# Altium PCB PCBFINAL.PcbDoc
Units mm, origin at the board's own origin, x right, y up, seen from the top; angles counter-clockwise.
Board outline 189.99 x 133.6 mm, 4 copper layers (POWER, PGND, LOW POWER, SIGNAL/SGND); 85 components, 39 nets, 251 pads, 4 vias.
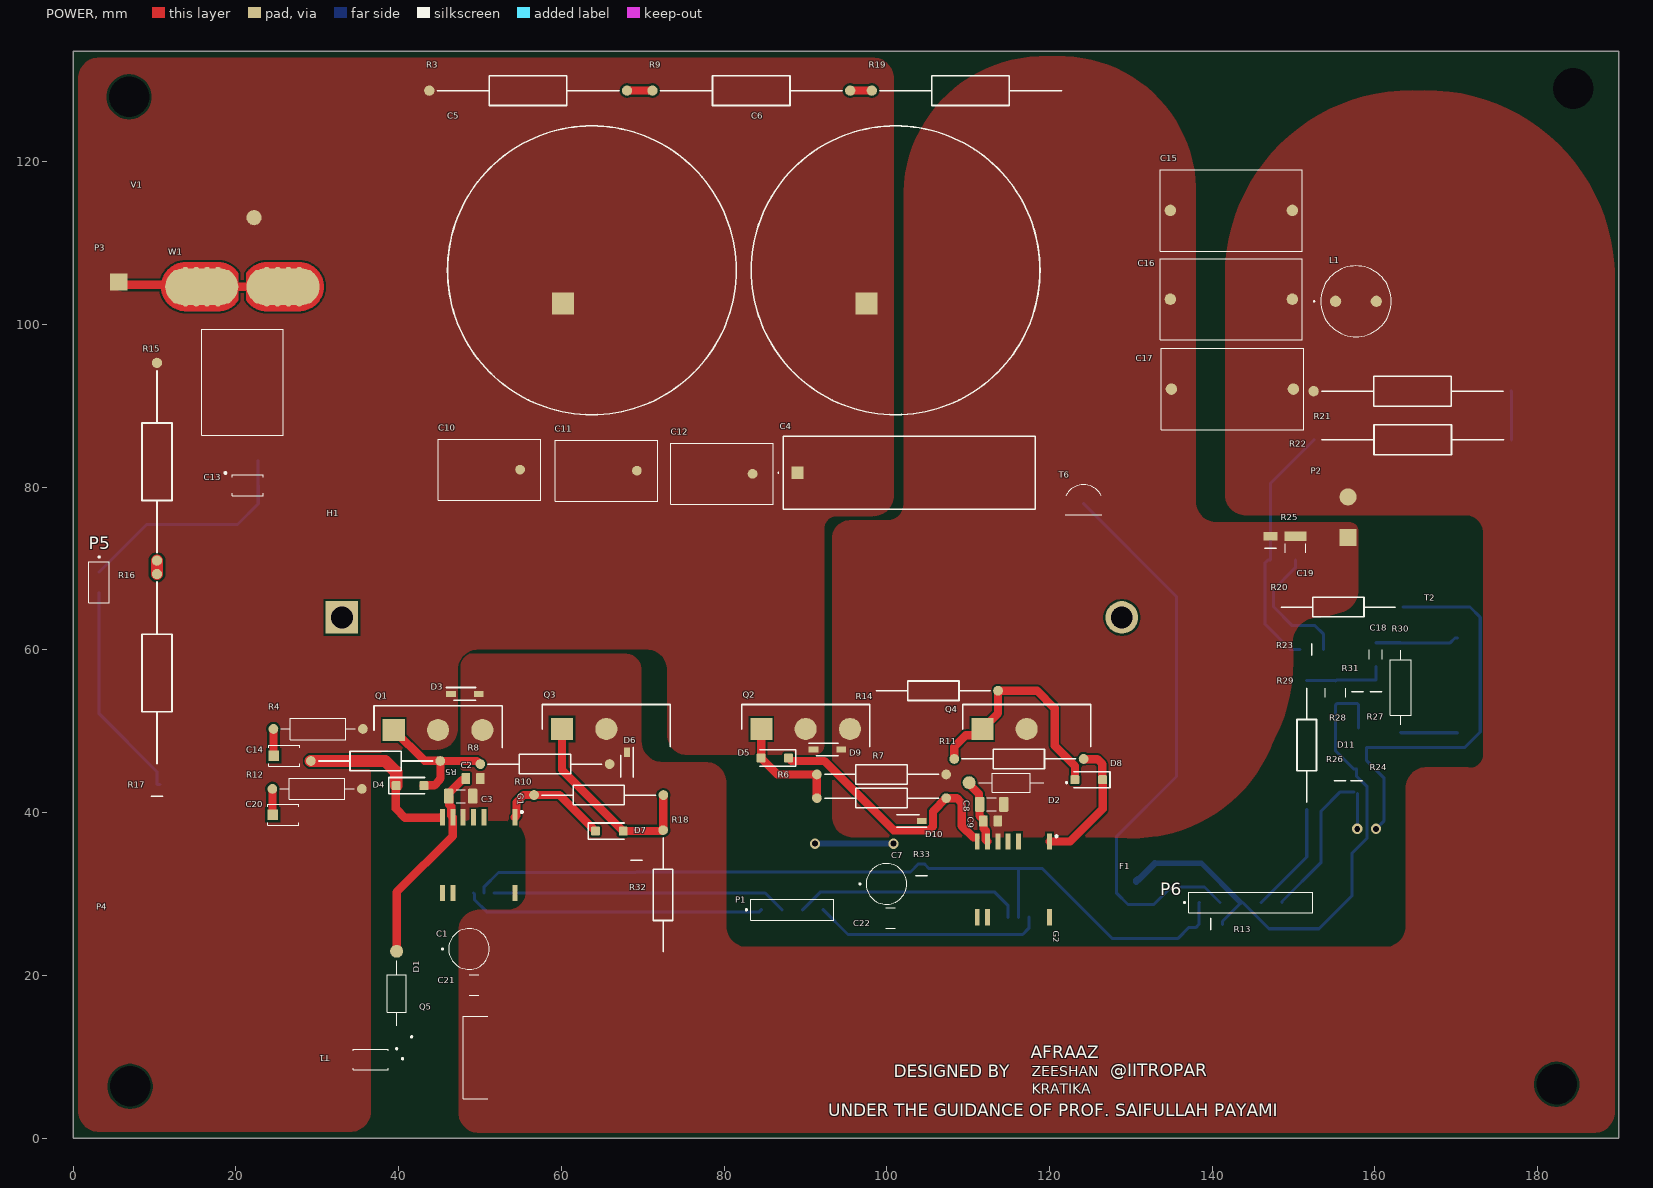
[diagram p0: POWER view]
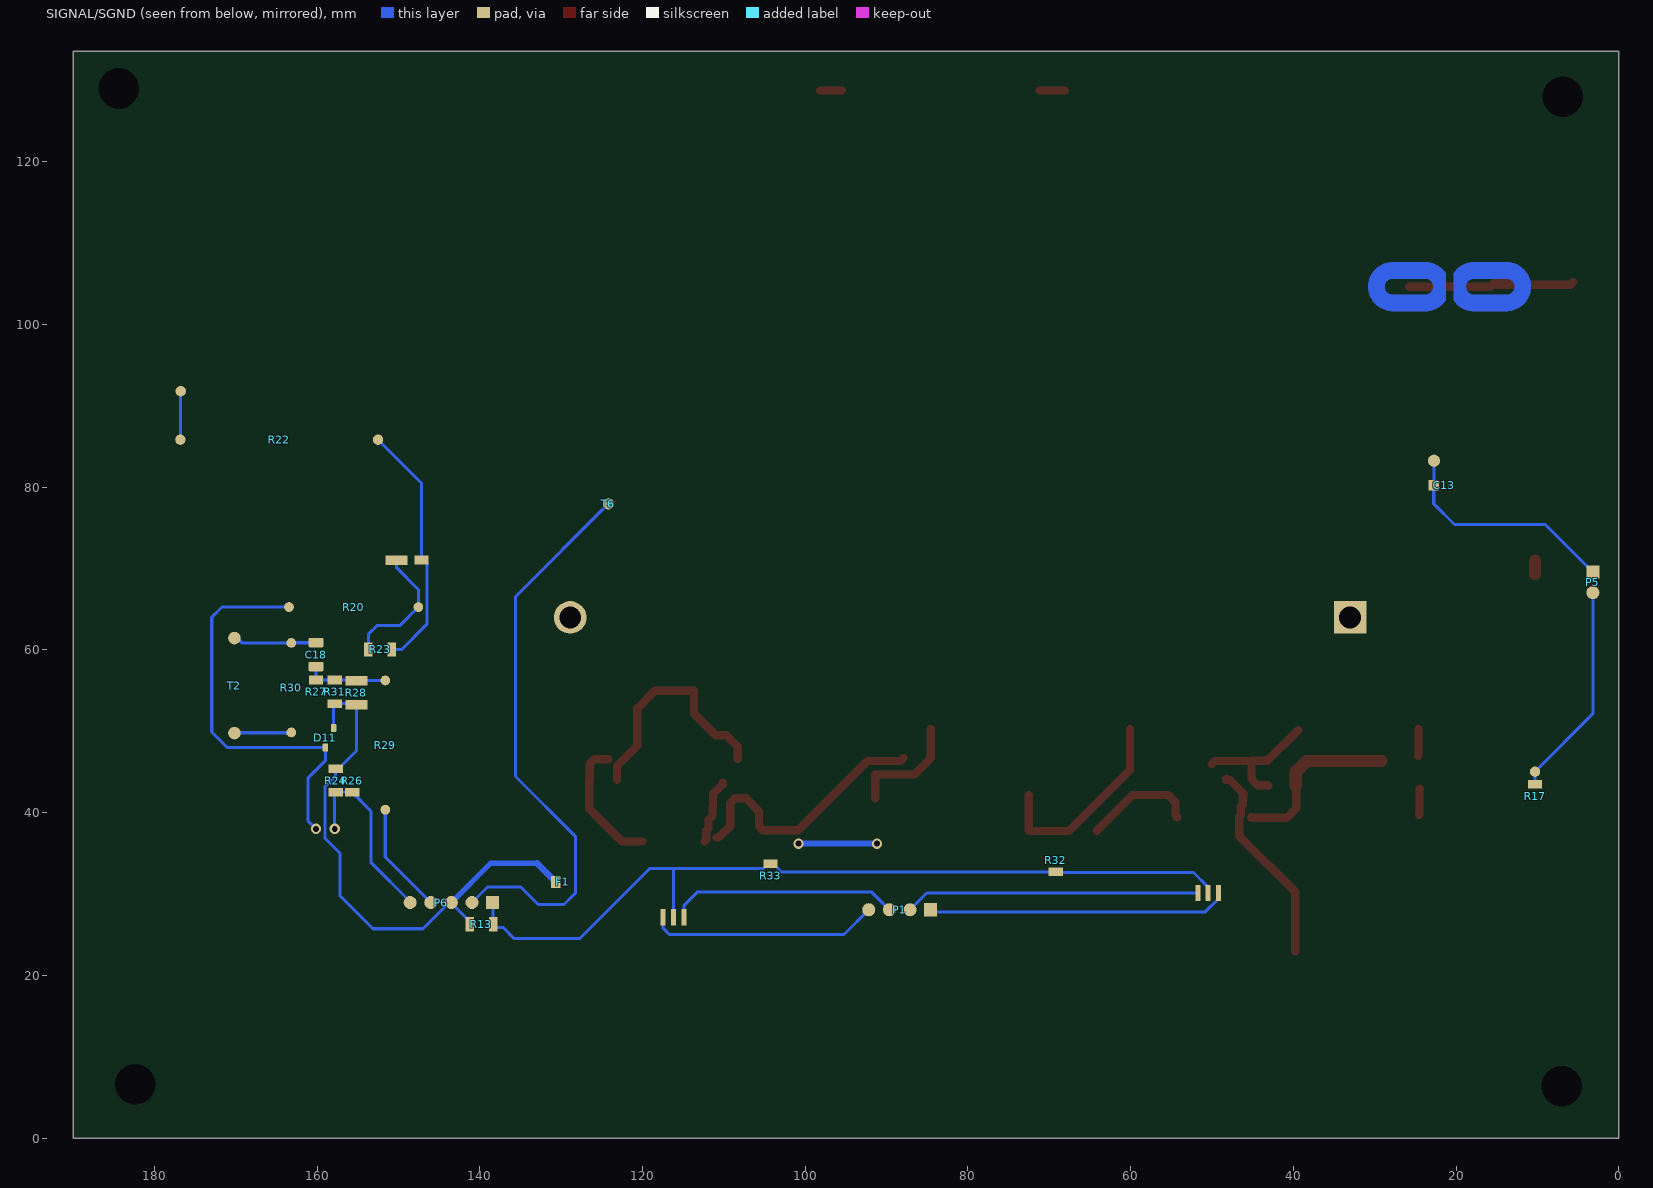
[diagram p1: SIGNAL/SGND view, seen from below]
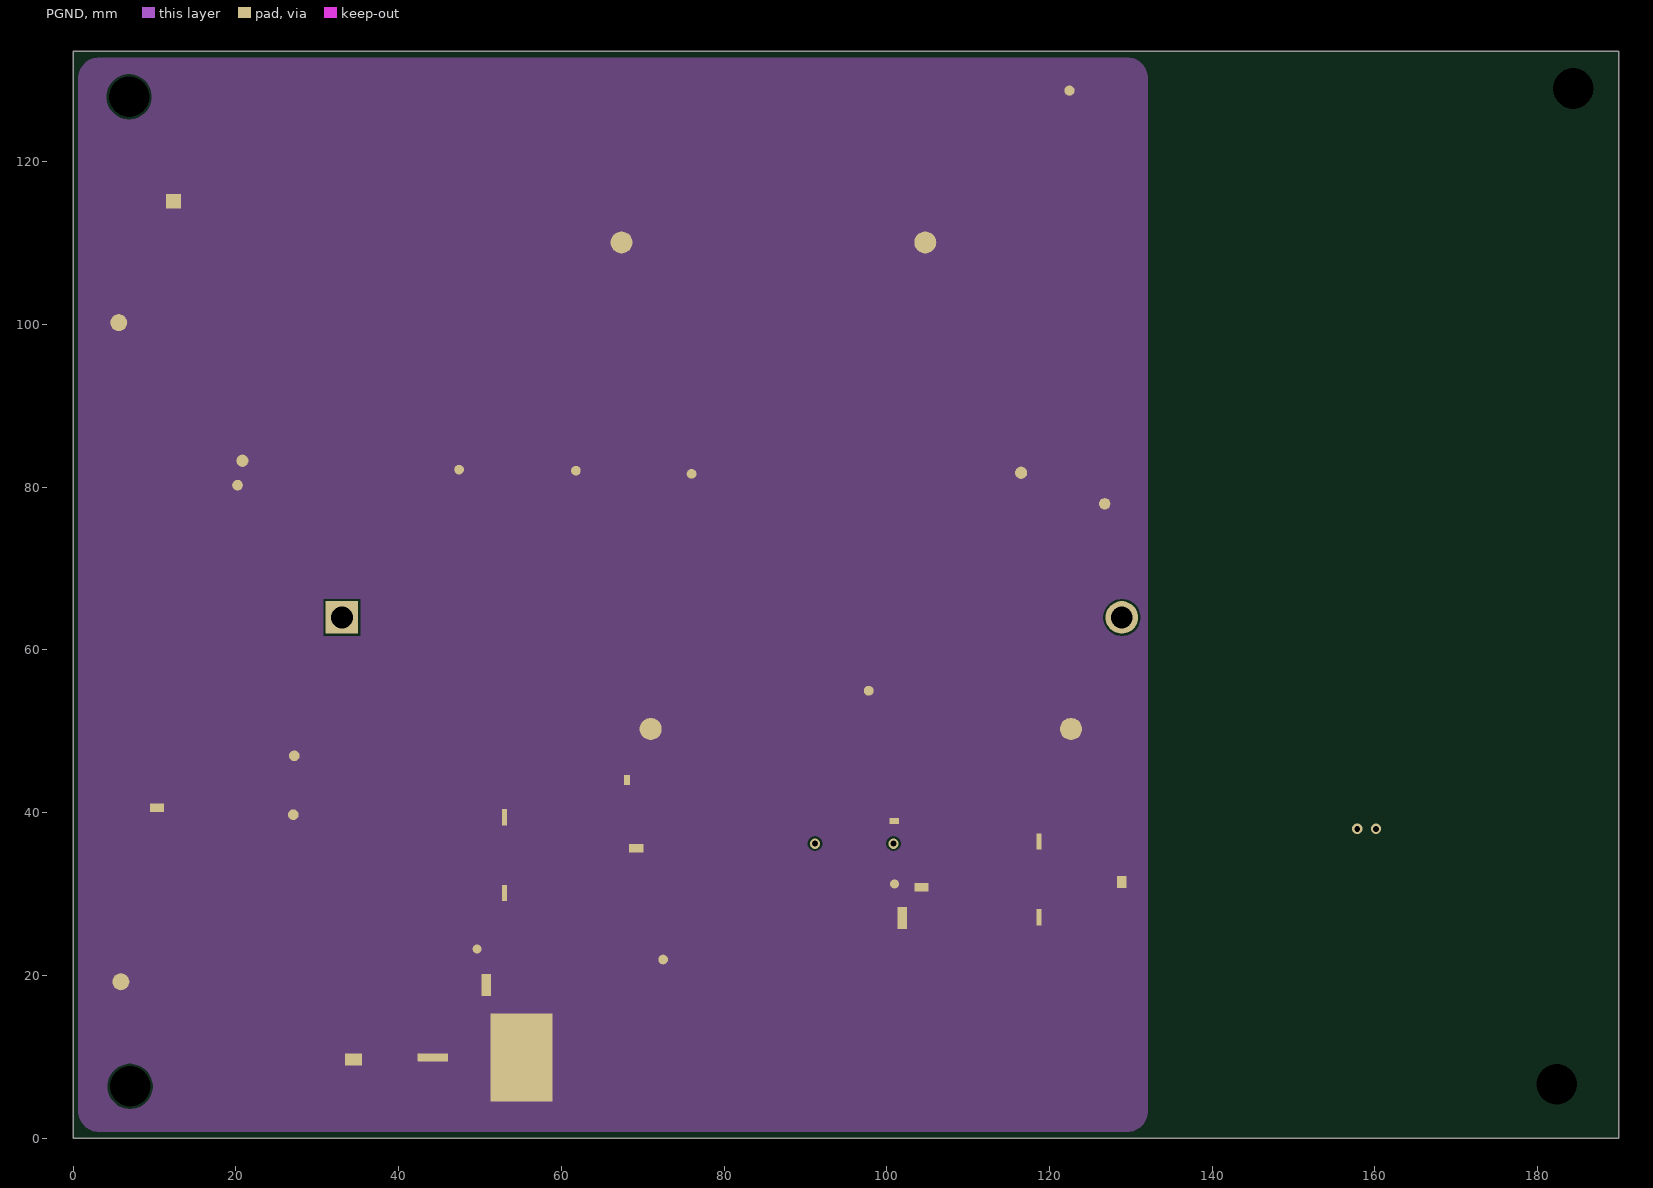
[diagram p2: PGND]
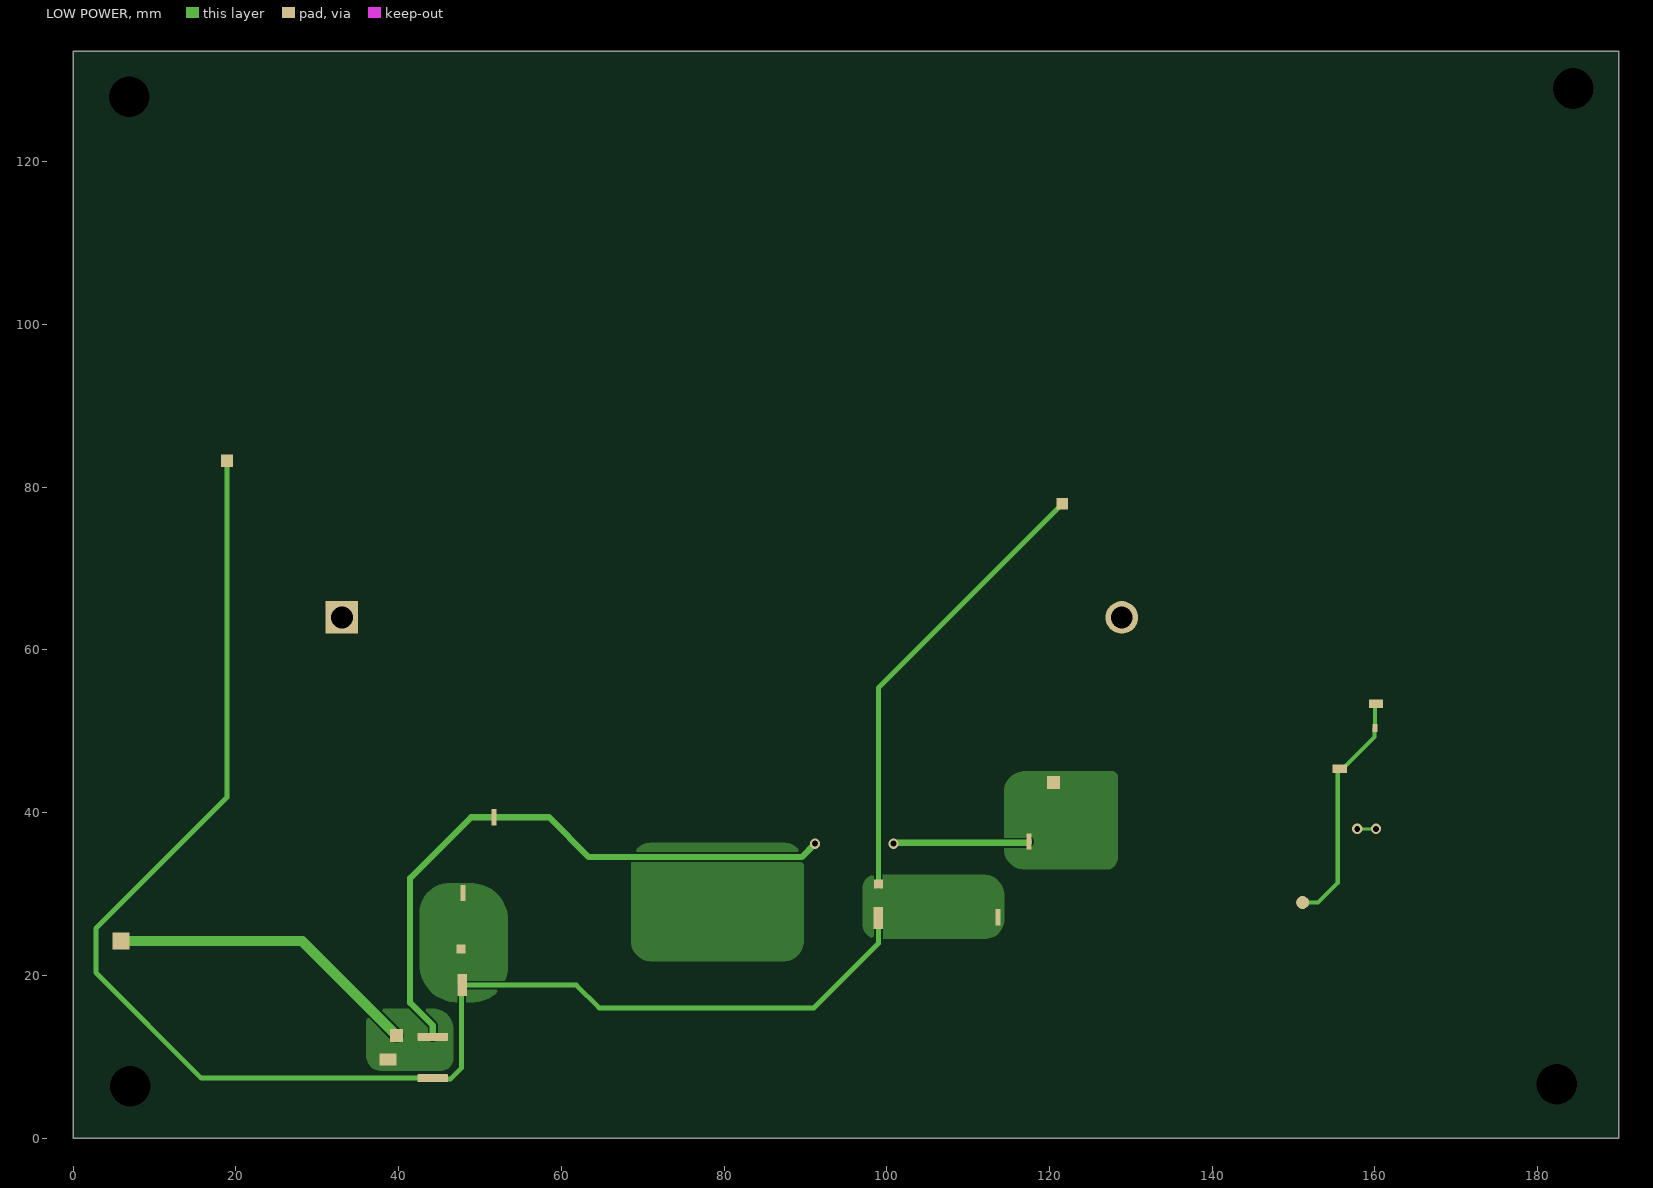
[diagram p3: LOW POWER]
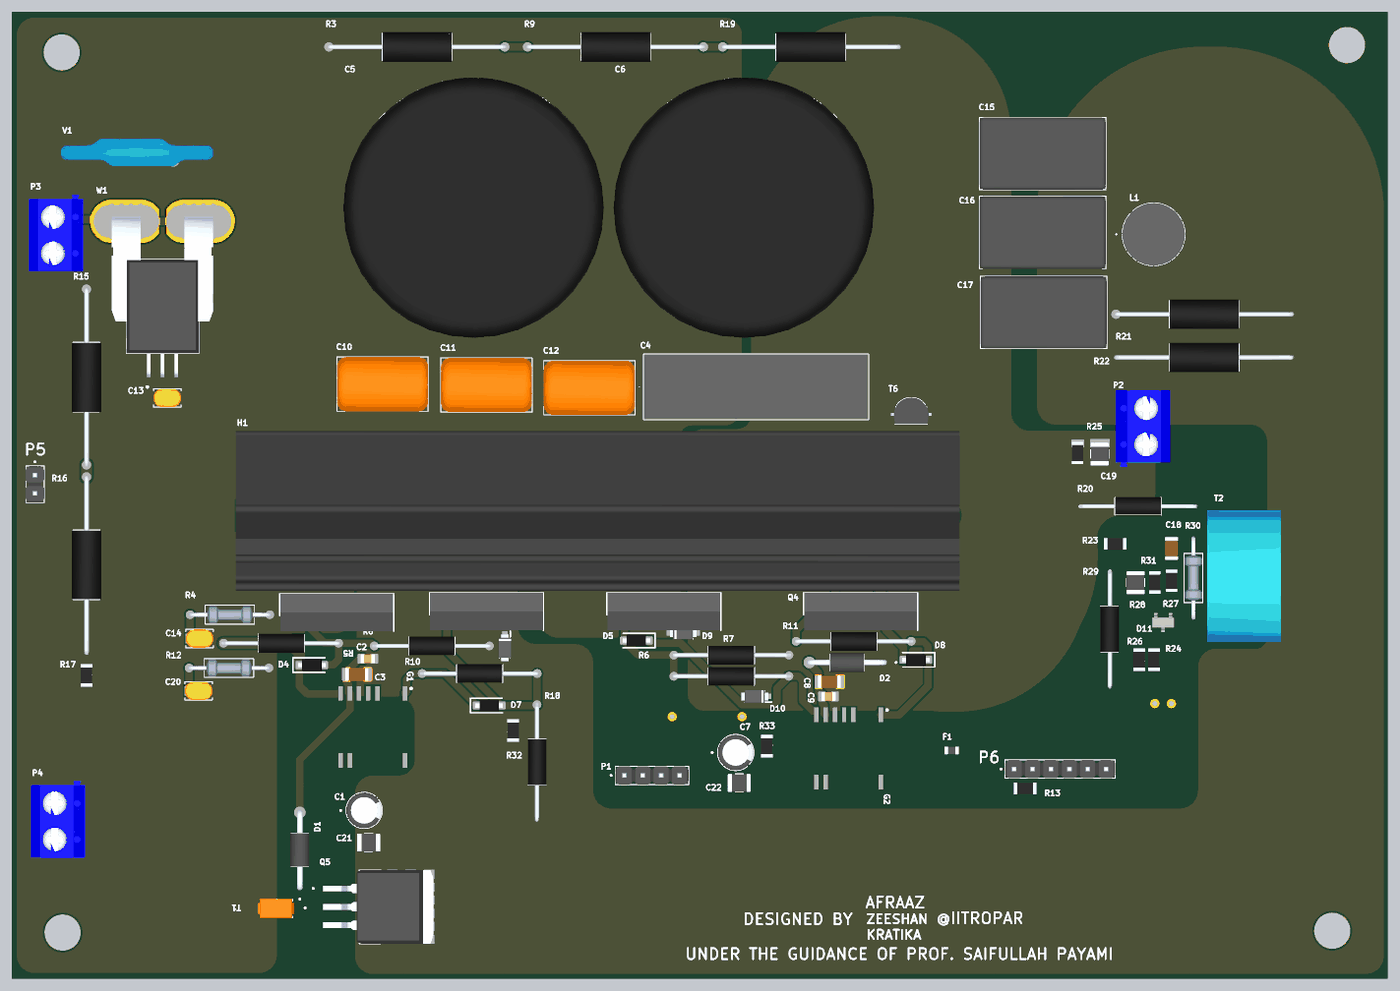
[diagram p4: 3D render of the assembled board from above, using the file's embedded part models]

## Layer stack, top to bottom
Top Solder: solder mask 0.0102, Solder Resist, Dk 3.5
POWER: signal copper 0.0356
Dielectric 1: dielectric 0.32, FR-4, Dk 4.8
PGND: signal copper 0.0356
Dielectric3: dielectric 0.32, FR-4, Dk 4.8
LOW POWER: signal copper 0.0356
Dielectric2: dielectric 0.32, FR-4, Dk 4.8
SIGNAL/SGND: signal copper 0.0356
Bottom Solder: solder mask 0.0102, Solder Resist, Dk 3.5

## Board outline
0,0 189.992,0 189.992,133.604 0,133.604

## Design rules (kind name [scope] priority, off if disabled: settings)
Clearance [All] p1: gap=0.254 ignorepadtopadclearanceinfootprint=FALSE
Height [All] p1: minheight=0 maxheight=53.34 prefheight=12.7
HoleSize [All] p1: absolutevalues=TRUE maxlimit=5.08 minlimit=0.025 maxpercent=80.000 minpercent=20.000
PolygonConnect [All] p1: connectstyle=Direct reliefconductorwidth=0.254 reliefentries=4 polygonreliefangle="90 Angle" airgapwidth=0.254
RoutingVias [All] p1: holewidth=0.711 width=1.27 viastyle="Through Hole" minholewidth=0.711 minwidth=1.27 maxholewidth=0.711 maxwidth=1.27
SilkToSolderMaskClearance [IsPad] p1: minsilkscreentomaskgap=0.203 clearancetoexposedcopper=TRUE
SolderMaskExpansion [All] p1: expansion=0 istentingtop=FALSE
SupplyNets "Schematic Supply Nets_4" [InNet('+12')] p1: voltage=0.000
SupplyNets "Schematic Supply Nets_3" [InNet('+380V')] p2: voltage=0.000
SupplyNets "Schematic Supply Nets_2" [InNet('SGND')] p3: voltage=0.000
SupplyNets "Schematic Supply Nets_1" [InNet('+5')] p4: voltage=0.000
SupplyNets "Schematic Supply Nets" [InNet('PGND')] p5: voltage=0.000
Width [All] p1: maxlimit=2.032 minlimit=0.254 preferedwidth=0.813 toplayer_prefwidth=1.524 midlayer1_maxwidth=0.254 midlayer1_prefwidth=0.254 midlayer2_maxwidth=1.27 bottomlayer_maxwidth=0.813 bottomlayer_prefwidth=0.381 minimp=50.000000 maximp=50.000000 favimp=50.000000
27 further rules are at their usual default settings.

## Components (designator, comment, footprint, x,y, rotation, side; value= is the part's Value field where it differs from the comment)
C1 "22u" 22uF 49.149,24.13 r0 top
C2 "1uF(New)" 1uF(New) 49.149,44.196 r180 top
C3 "1uF" 1uF#1 47.625,41.91 r180 top
C4 "1uF Film" 1.0uF/630V 102.108,82.296 r0 top
C5 "470uF/450V" "470 µF/450 V" 62.738,108.204 r0 top
C6 "470uF/450V" "470 µF/450 V" 100.076,108.204 r0 top
C7 "22u" 22uF 100.473,32.131 r0 top
C8 "1uF" 1uF#1 112.903,40.894 r180 top
C9 "1uF(New)" 1uF(New) 112.776,38.989 r180 top
C10 "33nF" 33nF 51.435,81.661 r180 top
C11 "33nF" 33nF 65.786,81.534 r180 top
C12 "33nF" 33nF 80.01,81.153 r180 top
C13 "1nF" 1nF#1 21.463,80.137 r180 top
C14 "1nF" 1nF#2 25.908,47.117 r0 top
C15 "2.2uF" 2.2uF 141.859,113.919 r180 top
C16 "2.2uF" 2.2uF 141.859,102.997 r180 top
C17 "2.2uF" 2.2uF 141.986,91.948 r180 top
C18 "1uF" 1uF#2 160.274,59.436 r270 top
C19 "100nF/100V" 100nF/100V#1 150.241,72.39 r90 top
C20 "1nF" 1nF#2 25.781,39.878 r0 top
C21 "100nF/100V" 100nF/100V#2 49.149,18.796 r0 top
C22 "100nF/100V" 100nF/100V#2 100.33,27.051 r0 top
D1 "Rectifier" Rectifier 39.878,17.78 r90 top
D2 "Rectifier" Rectifier 115.316,43.815 r180 top
D3 "Fast Switching Diode" "Fast Switching Diode"#1 48.006,54.737 r0 top
D4 "Zener Diode" "Zener Diode" 41.148,43.434 r0 top
D5 "Zener Diode" "Zener Diode" 86.487,46.609 r180 top
D6 "Fast Switching Diode" "Fast Switching Diode"#2 68.199,45.847 r270 top
D7 "Zener Diode" "Zener Diode" 65.659,37.846 r0 top
D8 "Zener Diode" "Zener Diode" 125.095,43.942 r180 top
D9 "Fast Switching Diode" "Fast Switching Diode"#1 92.583,47.879 r0 top
D10 "Fast Switching Diode" "Fast Switching Diode"#2 102.743,38.862 r180 top
D11 "Dual Diode" "Dual Diode" 158.878,49.205 r270 top
F1 "Ferrite Bead" "Ferrite Bead" 129.667,31.496 r180 top
G1 "Gate driver" "Gate Driver" 49.657,34.798 r270 top
G2 "Gate driver" "Gate Driver" 115.391,31.814 r270 top
H1 "Heatsink" HEATSINK 82.042,40.894 r0 top
L1 "2.2mH" 2.2mH 157.988,102.997 r0 top
P1 "4 PIN STM" "4 PIN STM" 88.519,28.194 r0 top
P2 "2 Pin Connector" "2 Pin Connector"#1 156.337,76.581 r90 top
P3 "2 Pin Connector" "2 Pin Connector"#2 5.969,102.489 r270 top
P4 "2 Pin Connector" "2 Pin Connector"#3 6.223,21.463 r270 top
P5 "2 PIN STM" "2 PIN STM" 3.175,68.072 r270 top
P6 "6 PIN STM" "6 PIN STM" 144.907,28.829 r0 top
Q1 "Mosfet" Mosfet#1 44.345,50.8 r0 top
Q2 "Mosfet" Mosfet#1 89.535,50.927 r0 top
Q3 "Mosfet" Mosfet#2 65.035,50.927 r0 top
Q4 "Mosfet" Mosfet#2 116.713,50.927 r0 top
Q5 "12 TO 5" "12 TO 5" 51.231,10.033 r0 top
R3 "1M" 1M#1 56.896,128.905 r180 top
R4 "100" 100 30.607,50.419 r0 top
R5 "22" 22 37.211,46.228 r0 top
R6 "22" 22 99.314,41.91 r180 top
R7 "1K" 1K#1 100.076,44.831 r180 top
R8 "1K" 1K#1 57.277,45.847 r0 top
R9 "1M" 1M#1 84.328,128.905 r180 top
R10 "22" 22 64.643,42.037 r0 top
R11 "22" 22 116.205,46.736 r180 top
R12 "100" 100 30.48,43.053 r0 top
R13 "10k" 10K#1 139.827,26.289 r180 top
R14 "1K" 1K#2 105.029,54.864 r0 top
R15 "1M" 1M#1 10.414,82.169 r90 top
R16 "1M" 1M#2 10.414,56.218 r90 top
R17 "10k" 10K#2 10.287,42.037 r90 top
R18 "1K" 1K#3 72.39,30.607 r270 top
R19 "1M" 1M#3 111.295,128.905 r180 top
R20 "1K" 1K#4 154.813,65.151 r0 top
R21 "1M" 1M#2 165.608,91.948 r180 top
R22 "1M" 1M#4 163.703,85.725 r0 top
R23 "10k" 10K#1 152.273,60.071 r180 top
R24 "10k" 10K#1 157.734,43.942 r270 top
R25 "10k" 10K#3 147.193,72.517 r270 top
R26 "10k" 10K#4 155.702,43.942 r270 top
R27 "10k" 10K#5 160.147,54.864 r270 top
R28 "100nF/100V" 100nF/100V#3 155.194,54.864 r270 top
R29 "1K" 1K#4 151.511,49.022 r270 top
R30 "50" 50 163.195,54.61 r90 top
R31 "10k" 10K#1 157.861,54.864 r90 top
R32 "10k" 10K#2 69.215,34.163 r270 top
R33 "10k" 10K#2 104.267,32.258 r90 top
T1 "TVS" TVS 36.576,9.525 r180 top
T2 "Current Transform" "Current Transformer" 170.434,55.626 r0 top
T6 "Temp Sensor" "Temp Sensor" 124.206,77.978 r0 top
V1 "MOV" MOV 16.764,114.3 r0 top
W1 "Current sensor" "Current Sensor" 21.044,95.109 r0 top

## Footprints (in the part's own frame and the unit in brackets; to place one, negate y for a bottom-side part, rotate by r counter-clockwise, add the part's x,y. Pads: shape width x height; smd on the part's side, far side on the other; paste and mask are expansions set on the pad)
1.0uF/630V [mm] "ECW-FE2J105QD"
  rect 1.5x1.5 smd: 1(-13.081,-0.508)
  round 1.5 on Mid1: 2(14.419,-0.508)
  silkscreen extent -15.48,-5.01 16.17,3.99, body extent -14.83,-5.01 16.17,3.99, height 19.6
1K#1 [mm]
  round 1.2 smd: 1(-7.239,0.127) 2(8.661,0.127)
  silkscreen extent -6.29,-1.07 7.71,1.33, body extent -7.54,-1.16 8.96,1.42, height 2.6
1K#2 [mm]
  round 1.2 on Mid1: 1(-7.239,0.127)
  round 1.2 smd: 2(8.661,0.127)
  silkscreen extent -6.29,-1.07 7.71,1.33, body extent -7.54,-1.16 8.96,1.42, height 2.6
1K#3 [mm]
  round 1.2 smd: 1(-7.239,0.127)
  round 1.2 on Mid1: 2(8.661,0.127)
  silkscreen extent -6.29,-1.07 7.71,1.33, body extent -7.54,-1.16 8.96,1.42, height 2.6
1K#4 [mm]
  round 1.2 smd far side: 1(-7.239,0.127) 2(8.661,0.127)
  silkscreen extent -6.29,-1.07 7.71,1.33, body extent -7.54,-1.16 8.96,1.42, height 2.6
1M#1 [mm]
  round 1.275 smd: 1(-11.176,0.127) 2(13.124,0.127)
  silkscreen extent -10.19,-1.71 12.14,1.97, body extent -11.5,-1.91 13.39,2.17, height 4.08
1M#2 [mm]
  round 1.275 smd far side: 1(-11.176,0.127)
  round 1.275 smd: 2(13.124,0.127)
  silkscreen extent -10.19,-1.71 12.14,1.97, body extent -11.5,-1.91 13.39,2.17, height 4.08
1M#3 [mm]
  round 1.275 on Mid1: 1(-11.176,0.127)
  round 1.275 smd: 2(13.124,0.127)
  silkscreen extent -10.19,-1.71 12.14,1.97, body extent -11.5,-1.91 13.39,2.17, height 4.08
1M#4 [mm]
  round 1.275 smd far side: 1(-11.176,0.127) 2(13.124,0.127)
  silkscreen extent -10.19,-1.71 12.14,1.97, body extent -11.5,-1.91 13.39,2.17, height 4.08
1nF#1 [mil]
  rect 51.89x51.89 smd far side mask+4.02: 1(-50,-5)
  round 51.89 on Mid1 mask+4.02: 2(50,-5)
  silkscreen extent -75,-55 75,45, body extent -75,-55 75,45, height 183
1nF#2 [mil]
  rect 51.89x51.89 smd mask+4.02: 1(-50,-5)
  round 51.89 on Mid1 mask+4.02: 2(50,-5)
  silkscreen extent -75,-55 75,45, body extent -75,-55 75,45, height 183
1uF#1 [mm] "C1206C105K1RACTU"
  rrect25% 1.16x1.82 smd paste+0 mask+0.102: 1(-1.475,-0.127) 2(1.475,-0.127)
  silkscreen extent -0.58,-0.93 0.58,0.67, body extent -1.6,-1.02 1.6,0.78, height 1.59
1uF#2 [mm] "C1206C105K1RACTU"
  rrect25% 1.16x1.82 smd far side paste+0 mask+0.102: 1(-1.475,-0.127) 2(1.475,-0.127)
  silkscreen extent -0.58,-0.93 0.58,0.67, body extent -1.6,-1.02 1.6,0.78, height 1.59
1uF(New) [mm]
  rrect25% 1.05x1.38 smd: 1(-0.888,0) 2(0.888,0)
  body extent -1,-0.63 1,0.63, height 1.35
"2 Pin Connector"#1 [mm] "KF301-2P"
  rect 2.1x2.1 smd: 1(-2.754,-0.381)
  round 2.1 smd: 2(2.246,-0.381)
  body extent -5.85,-3.62 4.75,3.88, height 10
"2 Pin Connector"#2 [mm] "KF301-2P"
  rect 2.1x2.1 smd: 1(-2.754,-0.381)
  round 2.1 on Mid1: 2(2.246,-0.381)
  body extent -5.85,-3.62 4.75,3.88, height 10
"2 Pin Connector"#3 [mm] "KF301-2P"
  rect 2.1x2.1 on Mid2: 1(-2.754,-0.381)
  round 2.1 on Mid1: 2(2.246,-0.381)
  body extent -5.85,-3.62 4.75,3.88, height 10
"2 PIN STM" [mm]
  rect 1.605x1.605 smd far side: 1(-1.524,0)
  round 1.605 smd far side: 2(1.016,0)
  silkscreen extent -3.45,-1.27 2.29,1.27, body extent -2.79,-1.27 2.29,1.27, height 8.74
2.2mH [mil]
  round 54.37 smd: 1(-110,-5) 2(86.85,-5)
  silkscreen extent -216,-176 160,166, body extent -183,-176 160,166, height 516
2.2uF [mm]
  round 1.4 smd: 1(-8.008,-0.127) 2(6.992,-0.127)
  silkscreen extent -9.26,-5.13 8.24,4.87, body extent -9.26,-5.13 8.24,4.87, height 15.5
"4 PIN STM" [mm]
  rect 1.605x1.605 smd far side: 1(-3.937,-0.127)
  round 1.605 smd far side: 2(-1.397,-0.127) 3(1.143,-0.127) 4(3.683,-0.127)
  silkscreen extent -5.87,-1.4 4.95,1.14, body extent -5.21,-1.4 4.95,1.14, height 8.74
"6 PIN STM" [mm]
  rect 1.605x1.605 smd far side: 1(-6.477,0.127)
  round 1.605 smd far side: 2(-3.937,0.127) 3(-1.397,0.127) 4(1.143,0.127) 5(3.683,0.127)
  round 1.605 on Mid2: 6(6.223,0.127)
  silkscreen extent -8.41,-1.14 7.49,1.4, body extent -7.75,-1.14 7.49,1.4, height 8.74
10K#1 [mm] "RC1206FR-0710KL"
  rect 1.05x1.75 smd far side: 1(-1.45,0) 2(1.45,0)
  silkscreen extent 0,-0.7 0,0.7, body extent -1.68,-0.8 1.42,0.8, height 0.65
10K#2 [mm] "RC1206FR-0710KL"
  rect 1.05x1.75 on Mid1: 1(-1.45,0)
  rect 1.05x1.75 smd far side: 2(1.45,0)
  silkscreen extent 0,-0.7 0,0.7, body extent -1.68,-0.8 1.42,0.8, height 0.65
10K#3 [mm] "RC1206FR-0710KL"
  rect 1.05x1.75 smd: 1(-1.45,0)
  rect 1.05x1.75 smd far side: 2(1.45,0)
  silkscreen extent 0,-0.7 0,0.7, body extent -1.68,-0.8 1.42,0.8, height 0.65
10K#4 [mm] "RC1206FR-0710KL"
  rect 1.05x1.75 on Mid2: 1(-1.45,0)
  rect 1.05x1.75 smd far side: 2(1.45,0)
  silkscreen extent 0,-0.7 0,0.7, body extent -1.68,-0.8 1.42,0.8, height 0.65
10K#5 [mm] "RC1206FR-0710KL"
  rect 1.05x1.75 smd far side: 1(-1.45,0)
  rect 1.05x1.75 on Mid2: 2(1.45,0)
  silkscreen extent 0,-0.7 0,0.7, body extent -1.68,-0.8 1.42,0.8, height 0.65
"12 TO 5" [mm]
  rrect25% 3.79x0.99 on Mid2: 1(-7.035,2.413) 3(-7.035,-2.667)
  rrect25% 3.79x0.99 on Mid1: 2(-7.035,-0.127)
  rect 7.62x10.84 on Mid1 paste-6: 4(3.845,-0.127)
  silkscreen extent -9.73,-5.21 -0.29,4.95, body extent -8.25,-5.21 6.98,4.95, height 4.83
22 [mm]
  round 1.2 smd: 1(-8.001,0.127) 2(7.899,0.127)
  silkscreen extent -7.05,-1.07 6.95,1.33, body extent -8.3,-1.16 8.2,1.42, height 2.6
22uF [mm]
  round 1.1 on Mid1: N(0.492,-0.889)
  rect 1.1x1.1 on Mid2: P(-1.508,-0.889)
  silkscreen extent -3.86,-3.39 1.99,1.61, body extent -3.01,-3.39 1.99,1.61, height 11
33nF [mm]
  round 1.2 smd: 1(-3.496,-0.508)
  round 1.2 on Mid1: 2(4.004,-0.508)
  silkscreen extent -6.05,-4.26 6.55,3.24, body extent -6.05,-4.26 6.55,3.24, height 15.5
50 [mm]
  round 1.2 smd far side: 1(-4.738,0) 2(6.262,0)
  silkscreen extent -3.82,-1.3 5.34,1.3, body extent -5.01,-1.2 6.54,1.2, height 2.4
100 [mm]
  round 1.2 smd: 1(-6.008,-0.127) 2(4.992,-0.127)
  silkscreen extent -5.09,-1.43 4.07,1.17, body extent -6.28,-1.33 5.27,1.07, height 2.4
100nF/100V#1 [mm] "C1210C104K1RACAUTO"
  rect 1.16x2.72 smd far side: 1(-1.348,0)
  rect 1.16x2.72 smd: 2(1.602,0)
  silkscreen extent -0.44,-1.25 0.7,1.25, body extent -1.47,-1.25 1.73,1.25, height 2.7
100nF/100V#2 [mm] "C1210C104K1RACAUTO"
  rect 1.16x2.72 on Mid2: 1(-1.348,0)
  rect 1.16x2.72 on Mid1: 2(1.602,0)
  silkscreen extent -0.44,-1.25 0.7,1.25, body extent -1.47,-1.25 1.73,1.25, height 2.7
100nF/100V#3 [mm] "C1210C104K1RACAUTO"
  rect 1.16x2.72 smd far side: 1(-1.348,0) 2(1.602,0)
  silkscreen extent -0.44,-1.25 0.7,1.25, body extent -1.47,-1.25 1.73,1.25, height 2.7
"470 µF/450 V" [mm] "ELG477M450AT6AA"
  rect 2.7x2.7 smd: 1(-2.54,-5.588)
  round 2.7 on Mid1: 2(4.666,1.905)
  silkscreen extent -16.73,-19.27 18.77,16.23, body extent -16.98,-19.65 19.02,16.35, height 53.34
"Current Sensor" [mm]
  rect 1.5x1.5 on Mid2: 1(-2.164,-11.843)
  round 1.5 on Mid1: 2(-0.254,-11.843)
  round 1.5 smd far side: 3(1.656,-11.843)
  oval 9x4.5 smd mask+0: 4(4.746,9.557) 5(-5.254,9.557)
  round 0.8 smd: 4_1(2.746,7.507) 4_2(4.076,7.507) 4_3(5.406,7.507) 4_4(6.736,7.507) 4_5(7.951,7.899) 4_6(8.696,8.924) 4_7(8.696,10.19) 4_8(7.951,11.215) 4_9(6.736,11.607) 4_10(5.406,11.607) 4_11(4.076,11.607) 4_12(2.746,11.607) 4_13(1.541,11.215) 4_14(0.796,10.19) 4_15(0.796,8.924) 4_16(1.541,7.899) 5_1(-7.254,7.507) 5_2(-5.924,7.507) 5_3(-4.594,7.507) 5_4(-3.264,7.507) 5_5(-8.459,7.899) 5_6(-9.204,10.19) 5_7(-9.204,8.924) 5_8(-8.459,11.215) 5_9(-7.254,11.607) 5_10(-5.924,11.607) 5_11(-4.594,11.607) 5_12(-3.264,11.607) 5_13(-2.049,11.215) 5_14(-1.304,10.19) 5_15(-1.304,8.924) 5_16(-2.049,7.899)
  POWER region: 4.746,10.557 2.746,10.557 2.694,10.556 2.641,10.552 2.59,10.545 2.538,10.535 2.487,10.523 2.437,10.508 2.388,10.491 2.339,10.471 2.292,10.448 2.246,10.423 2.201,10.396 2.158,10.366 2.117,10.334 2.077,10.3 2.039,10.264 2.003,10.226 1.969,10.186 1.937,10.145 1.907,10.102 1.88,10.057 1.855,10.011 1.832,9.964 1.812,9.915 1.795,9.866 1.78,9.816 1.768,9.765 1.758,9.713 1.751,9.662 1.747,9.609 1.746,9.557 1.747,9.505 1.751,9.452 1.758,9.401 1.768,9.349 1.78,9.298 1.795,9.248 1.812,9.199 1.832,9.15 1.855,9.103 1.88,9.057 1.907,9.012 1.937,8.969 1.969,8.928 2.003,8.888 2.039,8.85 2.077,8.814 2.117,8.78 2.158,8.748 2.201,8.718 2.246,8.691 2.292,8.666 2.339,8.643 2.388,8.623 2.437,8.606 2.487,8.591 2.538,8.579 2.59,8.569 2.641,8.562 2.694,8.558 2.746,8.557 4.746,8.557 4.746,6.557 2.657,6.557 2.558,6.56 2.46,6.567 2.362,6.577 2.264,6.59 2.167,6.607 2.07,6.626 1.974,6.649 1.879,6.676 1.785,6.705 1.691,6.738 1.599,6.774 1.509,6.812 1.419,6.854 1.331,6.899 1.245,6.947 1.16,6.998 1.077,7.051 0.996,7.107 0.917,7.166 0.84,7.228 0.765,7.292 0.692,7.359 0.622,7.428 0.554,7.499 0.488,7.573 0.425,7.649 0.364,7.727 0.306,7.807 0.246,7.897 0.246,11.217 0.306,11.307 0.364,11.387 0.425,11.465 0.488,11.541 0.554,11.615 0.622,11.686 0.692,11.755 0.765,11.822 0.84,11.886 0.917,11.948 0.996,12.007 1.077,12.063 1.16,12.116 1.245,12.167 1.331,12.215 1.419,12.26 1.509,12.302 1.599,12.34 1.691,12.376 1.785,12.409 1.879,12.438 1.974,12.465 2.07,12.488 2.167,12.507 2.264,12.524 2.362,12.537 2.46,12.547 2.558,12.554 2.657,12.557 4.746,12.557
  POWER region: 6.903,12.553 7.06,12.541 7.215,12.52 7.37,12.491 7.522,12.455 7.673,12.41 7.821,12.358 7.966,12.298 8.108,12.23 8.246,12.155 8.38,12.073 8.509,11.984 8.634,11.888 8.753,11.786 8.867,11.678 8.975,11.564 9.077,11.445 9.173,11.32 9.262,11.191 9.344,11.057 9.419,10.919 9.487,10.777 9.547,10.632 9.599,10.484 9.644,10.333 9.68,10.181 9.709,10.026 9.73,9.871 9.742,9.714 9.746,9.557 9.742,9.4 9.73,9.243 9.709,9.088 9.68,8.933 9.644,8.781 9.599,8.63 9.547,8.482 9.487,8.337 9.419,8.195 9.344,8.057 9.262,7.923 9.173,7.794 9.077,7.669 8.975,7.55 8.867,7.436 8.753,7.328 8.634,7.226 8.509,7.13 8.38,7.041 8.246,6.959 8.108,6.884 7.966,6.816 7.821,6.756 7.673,6.704 7.522,6.659 7.37,6.623 7.215,6.594 7.06,6.573 6.903,6.561 6.746,6.557 4.746,6.557 4.746,8.557 6.746,8.557 6.798,8.558 6.851,8.562 6.902,8.569 6.954,8.579 7.005,8.591 7.055,8.606 7.104,8.623 7.153,8.643 7.2,8.666 7.246,8.691 7.291,8.718 7.334,8.748 7.375,8.78 7.415,8.814 7.453,8.85 7.489,8.888 7.523,8.928 7.555,8.969 7.585,9.012 7.612,9.057 7.637,9.103 7.66,9.15 7.68,9.199 7.697,9.248 7.712,9.298 7.724,9.349 7.734,9.401 7.741,9.452 7.745,9.505 7.746,9.557 7.745,9.609 7.741,9.662 7.734,9.713 7.724,9.765 7.712,9.816 7.697,9.866 7.68,9.915 7.66,9.964 7.637,10.011 7.612,10.057 7.585,10.102 7.555,10.145 7.523,10.186 7.489,10.226 7.453,10.264 7.415,10.3 7.375,10.334 7.334,10.366 7.291,10.396 7.246,10.423 7.2,10.448 7.153,10.471 7.104,10.491 7.055,10.508 7.005,10.523 6.954,10.535 6.902,10.545 6.851,10.552 6.798,10.556 6.746,10.557 4.746,10.557 4.746,12.557 6.746,12.557
  POWER region: -3.066,12.554 -2.968,12.547 -2.87,12.537 -2.772,12.524 -2.675,12.507 -2.578,12.488 -2.482,12.465 -2.387,12.438 -2.293,12.409 -2.199,12.376 -2.107,12.34 -2.017,12.302 -1.927,12.26 -1.839,12.215 -1.753,12.167 -1.668,12.116 -1.585,12.063 -1.504,12.007 -1.425,11.948 -1.348,11.886 -1.273,11.822 -1.2,11.755 -1.13,11.686 -1.062,11.615 -0.996,11.541 -0.933,11.465 -0.872,11.387 -0.814,11.307 -0.754,11.217 -0.754,7.897 -0.814,7.807 -0.872,7.727 -0.933,7.649 -0.996,7.573 -1.062,7.499 -1.13,7.428 -1.2,7.359 -1.273,7.292 -1.348,7.228 -1.425,7.166 -1.504,7.107 -1.585,7.051 -1.668,6.998 -1.753,6.947 -1.839,6.899 -1.927,6.854 -2.017,6.812 -2.107,6.774 -2.199,6.738 -2.293,6.705 -2.387,6.676 -2.482,6.649 -2.578,6.626 -2.675,6.607 -2.772,6.59 -2.87,6.577 -2.968,6.567 -3.066,6.56 -3.165,6.557 -5.254,6.557 -5.254,8.557 -3.254,8.557 -3.202,8.558 -3.149,8.562 -3.098,8.569 -3.046,8.579 -2.995,8.591 -2.945,8.606 -2.896,8.623 -2.847,8.643 -2.8,8.666 -2.754,8.691 -2.709,8.718 -2.666,8.748 -2.625,8.78 -2.585,8.814 -2.547,8.85 -2.511,8.888 -2.477,8.928 -2.445,8.969 -2.415,9.012 -2.388,9.057 -2.363,9.103 -2.34,9.15 -2.32,9.199 -2.303,9.248 -2.288,9.298 -2.276,9.349 -2.266,9.401 -2.259,9.452 -2.255,9.505 -2.254,9.557 -2.255,9.609 -2.259,9.662 -2.266,9.713 -2.276,9.765 -2.288,9.816 -2.303,9.866 -2.32,9.915 -2.34,9.964 -2.363,10.011 -2.388,10.057 -2.415,10.102 -2.445,10.145 -2.477,10.186 -2.511,10.226 -2.547,10.264 -2.585,10.3 -2.625,10.334 -2.666,10.366 -2.709,10.396 -2.754,10.423 -2.8,10.448 -2.847,10.471 -2.896,10.491 -2.945,10.508 -2.995,10.523 -3.046,10.535 -3.098,10.545 -3.149,10.552 -3.202,10.556 -3.254,10.557 -5.254,10.557 -5.254,12.557 -3.165,12.557
  POWER region: -5.254,10.557 -7.254,10.557 -7.306,10.556 -7.359,10.552 -7.41,10.545 -7.462,10.535 -7.513,10.523 -7.563,10.508 -7.612,10.491 -7.661,10.471 -7.708,10.448 -7.754,10.423 -7.799,10.396 -7.842,10.366 -7.883,10.334 -7.923,10.3 -7.961,10.264 -7.997,10.226 -8.031,10.186 -8.063,10.145 -8.093,10.102 -8.12,10.057 -8.145,10.011 -8.168,9.964 -8.188,9.915 -8.205,9.866 -8.22,9.816 -8.232,9.765 -8.242,9.713 -8.249,9.662 -8.253,9.609 -8.254,9.557 -8.253,9.505 -8.249,9.452 -8.242,9.401 -8.232,9.349 -8.22,9.298 -8.205,9.248 -8.188,9.199 -8.168,9.15 -8.145,9.103 -8.12,9.057 -8.093,9.012 -8.063,8.969 -8.031,8.928 -7.997,8.888 -7.961,8.85 -7.923,8.814 -7.883,8.78 -7.842,8.748 -7.799,8.718 -7.754,8.691 -7.708,8.666 -7.661,8.643 -7.612,8.623 -7.563,8.606 -7.513,8.591 -7.462,8.579 -7.41,8.569 -7.359,8.562 -7.306,8.558 -7.254,8.557 -5.254,8.557 -5.254,6.557 -7.254,6.557 -7.411,6.561 -7.568,6.573 -7.723,6.594 -7.878,6.623 -8.03,6.659 -8.181,6.704 -8.329,6.756 -8.474,6.816 -8.616,6.884 -8.754,6.959 -8.888,7.041 -9.017,7.13 -9.142,7.226 -9.261,7.328 -9.375,7.436 -9.483,7.55 -9.585,7.669 -9.681,7.794 -9.77,7.923 -9.852,8.057 -9.927,8.195 -9.995,8.337 -10.055,8.482 -10.107,8.63 -10.152,8.781 -10.188,8.933 -10.217,9.088 -10.238,9.243 -10.25,9.4 -10.254,9.557 -10.25,9.714 -10.238,9.871 -10.217,10.026 -10.188,10.181 -10.152,10.333 -10.107,10.484 -10.055,10.632 -9.995,10.777 -9.927,10.919 -9.852,11.057 -9.77,11.191 -9.681,11.32 -9.585,11.445 -9.483,11.564 -9.375,11.678 -9.261,11.786 -9.142,11.888 -9.017,11.984 -8.888,12.073 -8.754,12.155 -8.616,12.23 -8.474,12.298 -8.329,12.358 -8.181,12.41 -8.03,12.455 -7.878,12.491 -7.723,12.52 -7.568,12.541 -7.411,12.553 -7.254,12.557 -5.254,12.557
  SIGNAL/SGND region: 4.746,10.557 2.746,10.557 2.694,10.556 2.641,10.552 2.59,10.545 2.538,10.535 2.487,10.523 2.437,10.508 2.388,10.491 2.339,10.471 2.292,10.448 2.246,10.423 2.201,10.396 2.158,10.366 2.117,10.334 2.077,10.3 2.039,10.264 2.003,10.226 1.969,10.186 1.937,10.145 1.907,10.102 1.88,10.057 1.855,10.011 1.832,9.964 1.812,9.915 1.795,9.866 1.78,9.816 1.768,9.765 1.758,9.713 1.751,9.662 1.747,9.609 1.746,9.557 1.747,9.505 1.751,9.452 1.758,9.401 1.768,9.349 1.78,9.298 1.795,9.248 1.812,9.199 1.832,9.15 1.855,9.103 1.88,9.057 1.907,9.012 1.937,8.969 1.969,8.928 2.003,8.888 2.039,8.85 2.077,8.814 2.117,8.78 2.158,8.748 2.201,8.718 2.246,8.691 2.292,8.666 2.339,8.643 2.388,8.623 2.437,8.606 2.487,8.591 2.538,8.579 2.59,8.569 2.641,8.562 2.694,8.558 2.746,8.557 4.746,8.557 4.746,6.557 2.657,6.557 2.558,6.56 2.46,6.567 2.362,6.577 2.264,6.59 2.167,6.607 2.07,6.626 1.974,6.649 1.879,6.676 1.785,6.705 1.691,6.738 1.599,6.774 1.509,6.812 1.419,6.854 1.331,6.899 1.245,6.947 1.16,6.998 1.077,7.051 0.996,7.107 0.917,7.166 0.84,7.228 0.765,7.292 0.692,7.359 0.622,7.428 0.554,7.499 0.488,7.573 0.425,7.649 0.364,7.727 0.306,7.807 0.246,7.897 0.246,11.217 0.306,11.307 0.364,11.387 0.425,11.465 0.488,11.541 0.554,11.615 0.622,11.686 0.692,11.755 0.765,11.822 0.84,11.886 0.917,11.948 0.996,12.007 1.077,12.063 1.16,12.116 1.245,12.167 1.331,12.215 1.419,12.26 1.509,12.302 1.599,12.34 1.691,12.376 1.785,12.409 1.879,12.438 1.974,12.465 2.07,12.488 2.167,12.507 2.264,12.524 2.362,12.537 2.46,12.547 2.558,12.554 2.657,12.557 4.746,12.557
  SIGNAL/SGND region: 6.903,12.553 7.06,12.541 7.215,12.52 7.37,12.491 7.522,12.455 7.673,12.41 7.821,12.358 7.966,12.298 8.108,12.23 8.246,12.155 8.38,12.073 8.509,11.984 8.634,11.888 8.753,11.786 8.867,11.678 8.975,11.564 9.077,11.445 9.173,11.32 9.262,11.191 9.344,11.057 9.419,10.919 9.487,10.777 9.547,10.632 9.599,10.484 9.644,10.333 9.68,10.181 9.709,10.026 9.73,9.871 9.742,9.714 9.746,9.557 9.742,9.4 9.73,9.243 9.709,9.088 9.68,8.933 9.644,8.781 9.599,8.63 9.547,8.482 9.487,8.337 9.419,8.195 9.344,8.057 9.262,7.923 9.173,7.794 9.077,7.669 8.975,7.55 8.867,7.436 8.753,7.328 8.634,7.226 8.509,7.13 8.38,7.041 8.246,6.959 8.108,6.884 7.966,6.816 7.821,6.756 7.673,6.704 7.522,6.659 7.37,6.623 7.215,6.594 7.06,6.573 6.903,6.561 6.746,6.557 4.746,6.557 4.746,8.557 6.746,8.557 6.798,8.558 6.851,8.562 6.902,8.569 6.954,8.579 7.005,8.591 7.055,8.606 7.104,8.623 7.153,8.643 7.2,8.666 7.246,8.691 7.291,8.718 7.334,8.748 7.375,8.78 7.415,8.814 7.453,8.85 7.489,8.888 7.523,8.928 7.555,8.969 7.585,9.012 7.612,9.057 7.637,9.103 7.66,9.15 7.68,9.199 7.697,9.248 7.712,9.298 7.724,9.349 7.734,9.401 7.741,9.452 7.745,9.505 7.746,9.557 7.745,9.609 7.741,9.662 7.734,9.713 7.724,9.765 7.712,9.816 7.697,9.866 7.68,9.915 7.66,9.964 7.637,10.011 7.612,10.057 7.585,10.102 7.555,10.145 7.523,10.186 7.489,10.226 7.453,10.264 7.415,10.3 7.375,10.334 7.334,10.366 7.291,10.396 7.246,10.423 7.2,10.448 7.153,10.471 7.104,10.491 7.055,10.508 7.005,10.523 6.954,10.535 6.902,10.545 6.851,10.552 6.798,10.556 6.746,10.557 4.746,10.557 4.746,12.557 6.746,12.557
  SIGNAL/SGND region: -3.066,12.554 -2.968,12.547 -2.87,12.537 -2.772,12.524 -2.675,12.507 -2.578,12.488 -2.482,12.465 -2.387,12.438 -2.293,12.409 -2.199,12.376 -2.107,12.34 -2.017,12.302 -1.927,12.26 -1.839,12.215 -1.753,12.167 -1.668,12.116 -1.585,12.063 -1.504,12.007 -1.425,11.948 -1.348,11.886 -1.273,11.822 -1.2,11.755 -1.13,11.686 -1.062,11.615 -0.996,11.541 -0.933,11.465 -0.872,11.387 -0.814,11.307 -0.754,11.217 -0.754,7.897 -0.814,7.807 -0.872,7.727 -0.933,7.649 -0.996,7.573 -1.062,7.499 -1.13,7.428 -1.2,7.359 -1.273,7.292 -1.348,7.228 -1.425,7.166 -1.504,7.107 -1.585,7.051 -1.668,6.998 -1.753,6.947 -1.839,6.899 -1.927,6.854 -2.017,6.812 -2.107,6.774 -2.199,6.738 -2.293,6.705 -2.387,6.676 -2.482,6.649 -2.578,6.626 -2.675,6.607 -2.772,6.59 -2.87,6.577 -2.968,6.567 -3.066,6.56 -3.165,6.557 -5.254,6.557 -5.254,8.557 -3.254,8.557 -3.202,8.558 -3.149,8.562 -3.098,8.569 -3.046,8.579 -2.995,8.591 -2.945,8.606 -2.896,8.623 -2.847,8.643 -2.8,8.666 -2.754,8.691 -2.709,8.718 -2.666,8.748 -2.625,8.78 -2.585,8.814 -2.547,8.85 -2.511,8.888 -2.477,8.928 -2.445,8.969 -2.415,9.012 -2.388,9.057 -2.363,9.103 -2.34,9.15 -2.32,9.199 -2.303,9.248 -2.288,9.298 -2.276,9.349 -2.266,9.401 -2.259,9.452 -2.255,9.505 -2.254,9.557 -2.255,9.609 -2.259,9.662 -2.266,9.713 -2.276,9.765 -2.288,9.816 -2.303,9.866 -2.32,9.915 -2.34,9.964 -2.363,10.011 -2.388,10.057 -2.415,10.102 -2.445,10.145 -2.477,10.186 -2.511,10.226 -2.547,10.264 -2.585,10.3 -2.625,10.334 -2.666,10.366 -2.709,10.396 -2.754,10.423 -2.8,10.448 -2.847,10.471 -2.896,10.491 -2.945,10.508 -2.995,10.523 -3.046,10.535 -3.098,10.545 -3.149,10.552 -3.202,10.556 -3.254,10.557 -5.254,10.557 -5.254,12.557 -3.165,12.557
  SIGNAL/SGND region: -5.254,10.557 -7.254,10.557 -7.306,10.556 -7.359,10.552 -7.41,10.545 -7.462,10.535 -7.513,10.523 -7.563,10.508 -7.612,10.491 -7.661,10.471 -7.708,10.448 -7.754,10.423 -7.799,10.396 -7.842,10.366 -7.883,10.334 -7.923,10.3 -7.961,10.264 -7.997,10.226 -8.031,10.186 -8.063,10.145 -8.093,10.102 -8.12,10.057 -8.145,10.011 -8.168,9.964 -8.188,9.915 -8.205,9.866 -8.22,9.816 -8.232,9.765 -8.242,9.713 -8.249,9.662 -8.253,9.609 -8.254,9.557 -8.253,9.505 -8.249,9.452 -8.242,9.401 -8.232,9.349 -8.22,9.298 -8.205,9.248 -8.188,9.199 -8.168,9.15 -8.145,9.103 -8.12,9.057 -8.093,9.012 -8.063,8.969 -8.031,8.928 -7.997,8.888 -7.961,8.85 -7.923,8.814 -7.883,8.78 -7.842,8.748 -7.799,8.718 -7.754,8.691 -7.708,8.666 -7.661,8.643 -7.612,8.623 -7.563,8.606 -7.513,8.591 -7.462,8.579 -7.41,8.569 -7.359,8.562 -7.306,8.558 -7.254,8.557 -5.254,8.557 -5.254,6.557 -7.254,6.557 -7.411,6.561 -7.568,6.573 -7.723,6.594 -7.878,6.623 -8.03,6.659 -8.181,6.704 -8.329,6.756 -8.474,6.816 -8.616,6.884 -8.754,6.959 -8.888,7.041 -9.017,7.13 -9.142,7.226 -9.261,7.328 -9.375,7.436 -9.483,7.55 -9.585,7.669 -9.681,7.794 -9.77,7.923 -9.852,8.057 -9.927,8.195 -9.995,8.337 -10.055,8.482 -10.107,8.63 -10.152,8.781 -10.188,8.933 -10.217,9.088 -10.238,9.243 -10.25,9.4 -10.254,9.557 -10.25,9.714 -10.238,9.871 -10.217,10.026 -10.188,10.181 -10.152,10.333 -10.107,10.484 -10.055,10.632 -9.995,10.777 -9.927,10.919 -9.852,11.057 -9.77,11.191 -9.681,11.32 -9.585,11.445 -9.483,11.564 -9.375,11.678 -9.261,11.786 -9.142,11.888 -9.017,11.984 -8.888,12.073 -8.754,12.155 -8.616,12.23 -8.474,12.298 -8.329,12.358 -8.181,12.41 -8.03,12.455 -7.878,12.491 -7.723,12.52 -7.568,12.541 -7.411,12.553 -7.254,12.557 -5.254,12.557
  silkscreen extent -5.25,-13.46 4.75,4.31, body extent -7.25,-12.28 6.75,10.31, height 7.1
"Current Transformer" [mil]
  round 61 smd far side: S1(-10,230) S2(-10,-230)
  body extent -211,-358 191,358, height 764
"Dual Diode" [mm]
  rrect25% 1x0.65 on Mid2: 1(-1.201,1.146)
  rrect25% 1x0.65 smd far side: 2(-1.201,-0.894) 3(1.199,0.126)
  body extent -1.3,-1.39 1.3,1.65, height 1.3
"Fast Switching Diode"#1 [mm]
  rect 1.2x0.75 smd: 1(-1.573,-0.127) 2(1.827,-0.127)
  silkscreen extent -2.17,-0.9 1.48,0.65, body extent -1.72,-1.02 1.98,0.76, height 1
"Fast Switching Diode"#2 [mm]
  rect 1.2x0.75 smd: 1(-1.573,-0.127)
  rect 1.2x0.75 on Mid1: 2(1.827,-0.127)
  silkscreen extent -2.17,-0.9 1.48,0.65, body extent -1.72,-1.02 1.98,0.76, height 1
"Ferrite Bead" [mm]
  rect 1.14x1.47 smd far side: 1(-1.017,0)
  rect 1.14x1.47 on Mid1: 2(0.763,0)
  body extent -1.13,-0.54 0.87,0.51, height 1.23
"Gate Driver" [mm]
  rect 2x0.6 smd paste+0 mask+0: 1(-4.635,4.624) 4(-4.635,0.814) 5(-4.635,-0.456) 6(-4.635,-1.726) 7(-4.635,-2.996) 8(-4.635,-4.266) 9(4.665,-4.266) 10(4.665,-2.996) 16(4.665,4.624)
  rect 2x0.6 on Mid1 paste+0 mask+0: 2(-4.635,3.354) 15(4.665,3.354)
  rect 2x0.6 on Mid2 paste+0 mask+0: 3(-4.635,2.084) 11(4.665,-1.726)
  rect 2x0.6 smd far side paste+0 mask+0: 12(4.665,-0.456) 13(4.665,0.814) 14(4.665,2.084)
  silkscreen extent -5.41,5.35 -5.16,5.6, body extent -5.15,-4.97 5.18,5.33, height 2.65
HEATSINK [mm] "694-50"
  rect 4.005x4.005 hole 2.67: 1(-49.022,23.114)
  round 4.005 hole 2.67: 2(46.863,23.114)
  body extent -51.14,12.7 48.86,34.8, height 35.56
Mosfet#1 [mm]
  rect 2.715x2.715 smd: 1(-4.953,-0.635)
  round 2.715 smd: 2(0.497,-0.635) 3(5.947,-0.635)
  silkscreen extent -7.38,-2.79 8.37,2.36, body extent -7.3,-2.79 8.3,2.36, height 24.45
Mosfet#2 [mm]
  rect 2.715x2.715 smd: 1(-4.953,-0.635)
  round 2.715 smd: 2(0.497,-0.635)
  round 2.715 on Mid1: 3(5.947,-0.635)
  silkscreen extent -7.38,-2.79 8.37,2.36, body extent -7.3,-2.79 8.3,2.36, height 24.45
MOV [mm] "B72220S0421K101"
  rect 1.8x1.8 on Mid1: 1(-4.445,0.889)
  round 1.875 smd: 2(5.461,-1.143)
  body extent -9.99,-2.03 11.01,1.77, height 25.72
Rectifier [mm]
  rect 1.59x1.59 on Mid2: 1(-5.18,0.127)
  round 1.59 smd: 2(5.18,0.127)
  silkscreen extent -6.9,-1.05 4,1.3, body extent -5.57,-1.22 5.57,1.48, height 2.69
"Temp Sensor" [mm]
  rect 1.4x1.4 on Mid2 mask+0.05: 1(-2.6,0)
  round 1.4 smd far side mask+0.05: 2(0,0)
  round 1.4 on Mid1 mask+0.05: 3(2.6,0)
  silkscreen extent -2.23,-1.33 2.23,2.35, body extent -2.83,-1.33 2.83,2.35, height 9.34
TVS [mm]
  rect 2.12x1.5 on Mid1 paste+0 mask+0.102: A(2.115,-0.127)
  rect 2.12x1.5 on Mid2 paste+0 mask+0.102: C(-2.115,-0.127)
  silkscreen extent -4,-1.41 2.16,1.15, body extent -2.4,-1.52 2.65,1.18, height 2.19
"Zener Diode" [mm]
  rrect25% 1.1x1.1 smd: 1(-1.451,-0.11) 2(1.949,-0.11)
  silkscreen extent -2.35,-1.11 2.07,0.89, body extent -1.65,-0.91 2.15,0.69, height 1

## Part data
C1 C7: "EEU-FR1H220"
C2 C9: "CL21B105MBFNNNE"
C3 C8 C18: "C1206C105K1RACTU"
C4: "ECW-FE2J105QD"
C5 C6: "ELG477M450AT6AA"
C10 C11 C12: "ECW-FD2J333JB"
C13 C14 C20: "C315C102KAG5TA"
C15 C16 C17: "ECWFE2W225KA"
C19 C21 C22 R28: "C1210C104K1RACAUTO"
D1 D2: "MUR160G"
D3 D6 D9 D10: "1N4148W-7-F"
D4 D5 D7 D8: "BZT52C18"
D11: "BAT54C"
F1: "BLM21PG221SN1D"
G1 G2: "IR2110"
H1: "694-50"
L1: "RLB0914-222KL"
P1: "M20-9990446"
P2 P3 P4: "KF301-2P"
P5: "M20-9990246"
P6: "M20-9990646"
Q1 Q2 Q3 Q4: "STW69N65M5"
Q5: "LM7805S"
R3 R9 R15 R16 R19 R21 R22: "PTF651M0000BYEA"
R4 R12: "CFR-25JB-52-100R"
R5 R6 R10 R11: "CFR-25JR-52-22R"
R7 R8 R14 R18 R20 R29: "MF0207FRE52-1K"
R13 R17 R23 R24 R25 R26 R27 R31 R32 R33: "RC1206FR-0710KL"
R30: "MF0207FTE52-49R9"
T1: "SMAJ15A"
T2: "ZMCT103C"
T6: "LM35DZ"
V1: "B72220S0421K101"
W1: "ACS758LCB-050B-PFF-T"

## Free pads (board coordinates)
  round 1.524 hole 5: 1(6.858,128.016) 2(6.985,6.35) 3(182.372,6.604) 4(184.404,129.032)

## Via types
v1: diameter 1.27, hole 0.711, POWER to SIGNAL/SGND, 4 vias

## Nets (pads, with @x,y where several pads share a name; then routed paths per layer and width w, separated by ;. In a path a pad name is that pad's centre, name@x,y a point inside that pad or via, vN(x,y) a via of type N, cw(c..) or ccw(c..) an arc to the next point about the centre after c; other vN are vias at no path point)
+3.3V: D11.1 P6.6 R26.1 R27.2 | length 29.5
  LOW POWER w0.508: P6.6 153.035,28.956 155.448,31.369 155.448,45.138 R26.1 156.052,45.392 159.953,49.293 159.953,50.335 D11.1 160.024,53.291 R27.2
+5: C1.P C7.P C21.1 C22.1 G1.11 G2.11 Q5.3 T6.1 W1.1 | length 245.6
  LOW POWER w0.61: W1.1 18.88,41.867 2.794,25.781 2.794,20.32 15.748,7.366 Q5.3 ; Q5.3@44.196,7.239 46.355,7.239 47.752,8.636 47.752,18.747 C21.1 61.849,18.796 64.643,16.002 91.059,16.002 98.982,23.925 C22.1 ; C7.P 98.965,55.337 T6.1
+12: D1.1 D2.1 G1.3 G2.3 P4.1 Q5.1 T1.C | length 141.4
  LOW POWER w0.762: Q5.1 44.196,13.843 41.402,16.637 41.402,31.939 48.896,39.433 58.484,39.433 63.373,34.544 89.535,34.544 v1(91.186,36.195) ; v1(100.838,36.195) 100.935,36.292 117.394,36.292 117.475,36.373 G2.3
  LOW POWER w1.27: P4.1 28.134,24.217 D1.1
  SIGNAL/SGND w0.762: v1(91.186,36.195) v1(100.838,36.195)
+380V: C4.1 C5.1 C6.1 C10.1 C11.1 C12.1 D3.1 D9.1 P3.1 Q1.2 Q2.2 R3.2 R4.2 R12.2 R15.2 V1.2 W1.4 W1.4_1 W1.4_2 W1.4_3 W1.4_4 W1.4_5 W1.4_6 W1.4_7 W1.4_8 W1.4_9 W1.4_10 W1.4_11 W1.4_12 W1.4_13 W1.4_14 W1.4_15 W1.4_16 W1.5 W1.5_1 W1.5_2 W1.5_3 W1.5_4 W1.5_5 W1.5_6 W1.5_7 W1.5_8 W1.5_9 W1.5_10 W1.5_11 W1.5_12 W1.5_13 W1.5_14 W1.5_15 W1.5_16 | length 24.6
  POWER w1.016: P3.1 5.929,104.902 15.554,104.902 W1.5 ; W1.5@11.84,105.195 15.261,105.195 W1.5 ; W1.4 W1.5
AC_LINE: C2.1 C3.1 C15.1 C16.1 C17.1 D3.2 D6.1 G1.6 L1.1 L1.2 P2.2 Q1.3 Q3.2 R8.2 R21.2
AC_NEUTRAL: C8.1 C9.1 C15.2 C16.2 C17.2 C19.2 D9.2 D10.1 G2.6 P2.1 Q2.3 Q4.2 R7.1 R25.1
COUT_FB: P6.4 R29.2 | length 13.7
  SIGNAL/SGND w0.381: P6.4 151.638,34.544 R29.2
CURRENT_FB: C13.1 P5.1 W1.3 | length 28.3
  SIGNAL/SGND w0.381: P5.1 9.017,75.438 20.193,75.438 22.733,77.978 C13.1 22.7,80.297 W1.3
HIN_A: G1.12 P1.1 | length 36.9
  SIGNAL/SGND w0.381: G1.12 49.31,30.023 49.31,29.323 50.821,27.813 84.328,27.813 P1.1
HIN_B: G2.12 P1.3 | length 28.3
  SIGNAL/SGND w0.381: P1.3 91.821,30.226 113.284,30.226 114.935,28.575 G2.12
LIN_A: G1.14 P1.2 | length 36.2
  SIGNAL/SGND w0.381: G1.14 85.056,30.133 P1.2
LIN_B: G2.14 P1.4 | length 28.2
  SIGNAL/SGND w0.381: P1.4 95.25,25.019 97.282,25.019 116.713,25.019 117.475,25.781 G2.14
NetC2_2: C2.2 C3.2 D1.2 G1.7 | length 25.1
  POWER w1.016: D1.2 39.751,30.226 46.661,37.136 G1.7 46.453,39.641 46.453,40.749 46.222,40.98 46.222,41.965 C3.2 ; C3.2@46.15,42.367 47.797,44.014 48.244,44.014 48.261,44.031 C2.2
NetC8_2: C8.2 C9.2 D2.2 G2.7 | length 8.2
  POWER w1.016: D2.2 110.136,43.533 111.356,42.313 111.356,40.706 111.422,40.64 111.422,39.62 111.888,39.154 C9.2 111.905,38.972 111.905,38.047 112.187,37.765 112.187,36.657 G2.7
NetC14_1: C14.1 R4.1 | length 3.3
  POWER w1.016: R4.1 24.619,50.273 24.619,47.009 C14.1
NetC18_1: C18.1 R30.2 T2.S1 | length 10.3
  SIGNAL/SGND w0.381: C18.1 160.166,60.892 163.175,60.892 R30.2 169.268,60.872 169.864,61.468 T2.S1
NetC18_2: C18.2 R27.1 R28.1 R29.1 R31.2 | length 10.2
  SIGNAL/SGND w0.381: R29.1 155.145,56.261 R28.1 155.296,56.314 R31.2 R27.1 C18.2
NetC19_1: C19.1 R20.1 R23.1 | length 16.3
  SIGNAL/SGND w0.381: C19.1 150.241,70.104 147.574,67.437 R20.1 149.86,62.992 152.654,62.992 153.723,61.923 R23.1
NetC20_1: C20.1 R12.1 | length 3.2
  POWER w1.016: R12.1 24.492,42.907 24.492,39.77 C20.1
NetD4_1: D4.1 G1.8 R5.1 | length 21.6
  POWER w1.016: D4.1 39.655,43.282 39.655,40.505 40.79,39.37 45.12,39.37 G1.8@45.183,39.433
  POWER w1.524: R5.1 38.354,46.355 39.697,45.012 D4.1
NetD4_2: D4.2 Q1.1 R5.2 R8.1 | length 17
  POWER w1.016: Q1.1 43.167,46.39 45.075,46.39 R5.2 ; D4.2 43.139,43.366 44.382,43.366 45.085,44.069 45.085,44.196 45.148,44.259 45.148,45.101 45.145,45.104 45.145,46.32 R5.2 ; R8.1 49.988,45.974 49.607,46.355 R5.2
NetD5_1: D5.1 G2.8 R6.1 | length 33
  POWER w1.016: D5.1 88.302,46.355 92.329,46.355 100.832,37.852 105.232,37.852 105.678,38.298 105.678,40.146 R6.1 108.625,41.783 109.22,41.188 109.22,38.379 110.658,36.941 G2.8@110.917,36.941
NetD5_2: D5.2 Q2.1 R6.2 R7.2 | length 14.2
  POWER w1.016: Q2.1 84.582,46.763 D5.2 86.553,44.704 R7.2 R6.2
NetD7_1: D7.1 G1.1 R10.1 | length 13.9
  POWER w1.016: G1.1 54.489,39.641 54.489,41.281 55.372,42.164 59.78,42.164 D7.1
NetD7_2: D7.2 Q3.1 R10.2 R18.1 | length 25
  POWER w1.016: Q3.1 60.082,45.262 D7.2 72.357,37.736 72.467,37.846 R18.1 72.53,37.859 72.53,42.152 R10.2
NetD8_1: D8.1 G2.1 R11.1 | length 16.3
  POWER w1.016: G2.1 122.555,36.449 126.546,40.44 D8.1 126.504,44.094 126.504,45.962 125.892,46.574 124.241,46.574 R11.1
NetD8_2: D8.2 Q4.1 R11.2 R14.2 | length 28.9
  POWER w1.016: R11.2 108.306,48.108 109.706,49.508 110.976,49.508 Q4.1 ; Q4.1@111.827,50.359 113.69,52.222 R14.2 ; R14.2@113.74,54.991 118.491,54.991 120.65,52.832 120.65,48.239 123.146,45.743 D8.2
NetR3_1: R3.1 R9.2 | length 3.1
  POWER w1.016: R3.1 R9.2
NetR9_1: R9.1 R19.2 | length 2.7
  POWER w1.016: R9.1 R19.2
NetR15_1: R15.1 R16.2 | length 1.7
  POWER w1.524: R16.2 R15.1
NetR21_1: R21.1 R22.2 | length 6
  SIGNAL/SGND w0.381: R21.1 176.805,91.8 176.805,85.874 R22.2
NetR22_1: R22.1 R23.2 R25.2 | length 30.9
  SIGNAL/SGND w0.381: R23.2 149.606,60.071 146.529,63.148 146.529,70.733 146.864,71.067 R25.2 147.193,80.518 R22.1
NetR30_1: R30.1 T2.S2 | length 7
  SIGNAL/SGND w0.381: R30.1 163.239,49.828 170.136,49.828 T2.S2
PGND: C1.N C4.2 C5.2 C6.2 C7.N C10.2 C11.2 C12.2 C13.2 C14.2 C20.2 C21.2 C22.2 D6.2 D10.2 F1.2 G1.2 G1.15 G2.2 G2.15 P3.2 P4.2 Q3.3 Q4.3 Q5.2 Q5.4 R14.1 R17.1 R18.2 R19.1 R32.1 R33.1 T1.A T6.3 V1.1 W1.2
SD_FAULT: G1.13 G2.13 P6.1 R13.2 R32.2 R33.2 | length 103.1
  SIGNAL/SGND w0.381: G1.13 50.471,30.833 52.276,32.638 69.14,32.638 R32.2 102.922,32.713 103.917,33.708 104.617,33.708 104.951,33.373 104.951,33.37 105.175,33.147 116.205,33.147 ; G2.13 116.205,33.147 ; P6.1 138.377,28.903 R13.2 138.377,26.243 138.043,25.908 137.16,25.908 135.763,24.511 127.762,24.511 119.126,33.147 116.205,33.147
SGND: D11.2 F1.1 P6.3 R13.1 R24.1 R28.2 R31.1 | length 67.7
  SIGNAL/SGND w0.381: R13.1 141.277,26.639 143.594,28.956 143.764,28.956 146.992,25.728 153.139,25.728 157.226,29.814 157.226,35.052 159.067,36.893 159.067,43.187 157.736,44.519 157.736,45.39 R24.1 157.384,45.392 155.194,47.582 R28.2 155.346,53.414 R31.1 157.984,53.291 D11.2
  SIGNAL/SGND w0.635: 132.97,33.782 138.684,33.782 P6.3
  SIGNAL/SGND w0.813: F1.1 F1.1@130.684,31.661 ; F1.1@130.848,31.825 131.013,31.825 132.97,33.782
TEMP_FB: P6.2 T6.2 | length 70.6
  SIGNAL/SGND w0.381: T6.2 135.636,66.548 135.636,44.45 128.27,37.084 128.27,30.099 129.667,28.702 132.842,28.702 135.001,30.861 139.065,30.861 P6.2
VBUS_FB: P5.2 R16.1 R17.2 | length 26.9
  SIGNAL/SGND w0.381: P5.2 3.175,52.154 R16.1 R17.2 R17.2@10.637,43.487
VOUT_FB: D11.3 P6.5 R20.2 R24.2 R26.2 | length 75.1
  LOW POWER w0.381: v1(157.861,38.006) v1(160.147,38.006)
  SIGNAL/SGND w0.381: P6.5 148.59,29.083 153.416,33.909 153.416,40.206 R26.2 155.773,42.563 R24.2@157.434,42.563 ; v1(157.861,38.006) R24.2@157.861,42.365 ; v1(160.147,38.006) 161.163,39.022 161.163,44.232 159.004,46.391 D11.3 171.069,48.006 172.974,49.911 172.974,64.008 171.704,65.278 R20.2
pads on no net: G1.4 G1.5 G1.9 G1.10 G1.16 G2.4 G2.5 G2.9 G2.10 G2.16 H1.1 H1.2

## Polygon pours and split planes (outlines as drawn)
AC_NEUTRAL on POWER "AC_NEUTRAL_L01_P009" (solid, pour order 9): 93.306,39.516 ccw(c95.846,39.516) 95.846,36.976 127.298,36.976 ccw(c129.758,60.551) 133.404,37.13 ccw(c130.397,55.123) 147.408,48.533 ccw(c123.56,61.246) 148.093,49.912 ccw(c129.036,58.605) 149.888,60.594 cw(c152.944,60.886) 152.103,63.839 cw(c153.778,57.964) 154.012,64.069 155.961,64.637 ccw(c155.189,67.287) 157.949,67.287 157.949,74.695 ccw(c156.933,74.695) 156.933,75.711 140.55,75.711 cw(c140.55,78.251) 138.01,78.251 138.01,116.371 ccw(c121.393,116.371) 121.393,132.988 119.291,132.988 ccw(c119.272,115.785) 102.069,115.785 102.069,77.87 cw(c100.164,77.87) 100.164,75.965 95.592,75.965 ccw(c95.592,73.679) 93.306,73.679
+380V on POWER "+380V_L01_P008" (solid, pour order 8): 92.329,48.26 cw(c91.186,48.26) 91.186,47.117 75.438,47.117 cw(c75.438,49.53) 73.025,49.53 73.025,57.531 ccw(c70.485,57.531) 70.485,60.071 49.784,60.071 ccw(c49.784,57.531) 47.244,57.531 47.244,50.292 cw(c44.704,50.292) 44.704,47.752 39.116,47.752 ccw(c39.116,45.212) 36.576,45.212 36.576,3.302 cw(c34.036,3.302) 34.036,0.762 3.175,0.762 cw(c3.175,3.302) 0.635,3.302 0.635,130.302 cw(c3.175,130.302) 3.175,132.842 98.298,132.842 cw(c98.298,130.302) 100.838,130.302 100.838,78.994 cw(c98.298,78.994) 98.298,76.454 93.853,76.454 ccw(c93.853,74.93) 92.329,74.93
AC_LINE on POWER "AC_LINE_L01_P025" (solid, pour order 25): 47.625,58.166 47.625,39.878 ccw(c48.514,39.878) 48.514,38.989 53.086,38.989 cw(c53.086,36.449) 55.626,36.449 55.626,30.226 cw(c53.467,30.226) 53.467,28.067 49.911,28.067 ccw(c49.911,25.527) 47.371,25.527 47.371,3.175 ccw(c49.911,3.175) 49.911,0.635 186.944,0.635 ccw(c186.944,3.175) 189.484,3.175 189.484,106.698 ccw(c166.379,105.673) 165.354,128.778 ccw(c164.444,105.94) 141.605,106.82 141.605,79.121 ccw(c144.145,79.121) 144.145,76.581 171.069,76.581 cw(c171.069,74.295) 173.355,74.295 173.355,60.833 173.355,46.863 cw(c171.704,47.244) 171.323,45.593 166.37,45.593 ccw(c166.37,43.053) 163.83,43.053 163.83,26.035 cw(c161.29,26.035) 161.29,23.495 82.804,23.495 cw(c82.804,26.035) 80.264,26.035 80.264,43.688 ccw(c77.724,43.688) 77.724,46.228 72.39,46.228 cw(c72.39,48.768) 69.85,48.768 69.85,57.531 ccw(c67.818,57.531) 67.818,59.563 49.022,59.563 ccw(c49.022,58.166)
+12 on LOW POWER "+12_L03_P015" (solid, pour order 15): 68.58,33.782 cw(c71.12,33.782) 71.12,36.322 87.249,36.322 cw(c87.249,33.782) 89.789,33.782 89.789,24.257 cw(c87.249,24.257) 87.249,21.717 71.12,21.717 cw(c71.12,24.257) 68.58,24.257
+5 on LOW POWER "+5_L03_P017" (solid, pour order 17): 42.603,27.745 cw(c46.157,27.745) 46.157,31.3 48.951,31.3 cw(c48.957,26.86) 53.397,26.859 53.397,21.023 cw(c49.083,21.009) 49.082,16.695 47.176,16.695 cw(c47.176,21.268) 42.603,21.268
+12 on LOW POWER "+12_L03_P020" (solid, pour order 20): 114.427,42.545 cw(c116.967,42.545) 116.967,45.085 127.762,45.085 cw(c127.762,44.45) 128.397,44.45 128.397,34.417 cw(c127,34.417) 127,33.02 116.967,33.02 cw(c116.967,35.56) 114.427,35.56
+12 on LOW POWER "+12_L03_P022" (solid, pour order 22): 37.751,15.875 44.291,15.875 cw(c44.291,13.462) 46.704,13.462 46.704,9.779 cw(c45.18,9.779) 45.18,8.255 37.878,8.255 cw(c37.878,10.096) 36.036,10.096 36.036,14.16 cw(c37.751,14.16)
+5 on LOW POWER "+5_L03_P023" (solid, pour order 23): 111.887,32.385 cw(c111.887,29.845) 114.427,29.845 114.427,26.797 cw(c112.141,26.797) 112.141,24.511 98.806,24.511 cw(c98.806,26.289) 97.028,26.289 97.028,30.734 cw(c98.679,30.734) 98.679,32.385
PGND on PGND "PGND_L02_P013" (solid, pour order 13): 0.635,130.302 cw(c3.175,130.302) 3.175,132.842 129.54,132.842 cw(c129.54,130.302) 132.08,130.302 132.08,3.302 cw(c129.54,3.302) 129.54,0.762 3.175,0.762 cw(c3.175,3.302) 0.635,3.302 0.635,103.632

## Silkscreen, mask and mechanical layers (free items; w line width, h text height)
Top Overlay:
  text "AFRAAZ" at 117.729,9.779 h1.52
  text "ZEESHAN" at 117.856,7.62 h1.27
  text "@IITROPAR" at 127.508,7.62 h1.52
  text "DESIGNED BY" at 100.838,7.493 h1.52
  text "KRATIKA" at 117.856,5.461 h1.27
  text "UNDER THE GUIDANCE OF PROF. SAIFULLAH PAYAMI" at 92.837,2.667 h1.52